# EAGLE board PCB-BI8-2x8_dev (EAGLE 6.4)

Size 139.7 x 35.56 mm. Coordinates in mm from the lower left corner, seen from the top.
Outline: 0,0 139.7,0 139.7,35.56 0,35.56 0,0
Copper layers (1*16): Top 0.035mm / dielectric 1.5mm / Bottom 0.035mm
Design rules "Fusion_eagle_rule_v1.1": minimum track width 6mil, minimum drill 12mil, track to track 6mil, track to pad 6mil, pad to pad 6mil, via to via 6mil, smd to smd 0mil, copper to edge 10mil, drill to drill 10mil, minimum pad ring 10mil, minimum via ring 6mil, stop-mask expansion 2mil, vias tented up to drill 100mil, thermal gap 10mil
Net classes: 0 default: width 0.203 mm, drill 0.406 mm, clearance 0.203 mm; 1 Power: width 0.406 mm, drill 0.61 mm, clearance 0.203 mm

## Footprints (pad centres in the part's own frame; a part is rotated, then mirrored left to right if it is on the bottom)
LP11 = drill 1.2: COM 0,0; P$2 0,2.54; P$3 0,-2.54; P$4 4.5,3.81; P$5 4.5,-3.81 | hole 1.3: -6.35,6.35; 6.35,6.35; 6.35,-6.35; -6.35,-6.35
0603-CAP = smd 1.1 x 1: 1 -0.85,0; 2 0.85,0
0805 = smd 0.8 x 1.2: 1 -0.9,0; 2 0.9,0
SSOP28 = smd 0.4 x 1.5: 1 -4.225,-3.625; 2 -3.575,-3.625; 3 -2.925,-3.625; 4 -2.275,-3.625; 5 -1.625,-3.625; 6 -0.975,-3.625; 7 -0.325,-3.625; 8 0.325,-3.625; 9 0.975,-3.625; 10 1.625,-3.625; 11 2.275,-3.625; 12 2.925,-3.625; 13 3.575,-3.625; 14 4.225,-3.625; 15 4.225,3.625; 16 3.575,3.625; 17 2.925,3.625; 18 2.275,3.625; 19 1.625,3.625; 20 0.975,3.625; 21 0.325,3.625; 22 -0.325,3.625; 23 -0.975,3.625; 24 -1.625,3.625; 25 -2.275,3.625; 26 -2.925,3.625; 27 -3.575,3.625; 28 -4.225,3.625
TSSOP28 = smd 0.305 x 0.991: 1 -4.225,-2.918; 2 -3.575,-2.918; 3 -2.925,-2.918; 4 -2.275,-2.918; 5 -1.625,-2.918; 6 -0.975,-2.918; 7 -0.325,-2.918; 8 0.325,-2.918; 9 0.975,-2.918; 10 1.625,-2.918; 11 2.275,-2.918; 12 2.925,-2.918; 13 3.575,-2.918; 14 4.225,-2.918; 15 4.225,2.918; 16 3.575,2.918; 17 2.925,2.918; 18 2.275,2.918; 19 1.625,2.918; 20 0.975,2.918; 21 0.325,2.918; 22 -0.325,2.918; 23 -0.975,2.918; 24 -1.625,2.918; 25 -2.275,2.918; 26 -2.925,2.918; 27 -3.575,2.918; 28 -4.225,2.918
0603-RES = smd 1.1 x 1: 1 -0.85,0; 2 0.85,0
2X4 = drill 1.016 pad 1.88 octagon: 1 -3.81,-1.27; 2 -3.81,1.27; 3 -1.27,-1.27; 4 -1.27,1.27; 5 1.27,-1.27; 6 1.27,1.27; 7 3.81,-1.27; 8 3.81,1.27
3.2MMPAD6MM = drill 3.2 pad 6: P$1 0,0
3BITADDR = drill 0.6: A0 -2.2,0; A1 0,0; A2 2.2,0; H1 -2.2,2; H2 0,2; H3 2.2,2; L1 -2.2,-2; L2 0,-2; L3 2.2,-2

## Placement (x,y rotation side)
B1  LP11-B"  [LP11]  16.51,10.16 0 top
B1ALT  LP11-B"  [LP11]  16.51,17.78 180 top
B2  LP11-B"  [LP11]  31.75,10.16 180 top
B3  LP11-B"  [LP11]  46.99,10.16 0 top
B4  LP11-B"  [LP11]  62.23,10.16 0 top
B4ALT  LP11-B"  [LP11]  54.61,10.16 0 top
B5  LP11-B"  [LP11]  16.51,25.4 0 top
B6  LP11-B"  [LP11]  31.75,25.4 180 top
B7  LP11-B"  [LP11]  46.99,25.4 0 top
B8  LP11-B"  [LP11]  62.23,25.4 0 top
B8ALT  LP11-B"  [LP11]  54.61,25.4 0 top
B9  LP11-B"  [LP11]  77.47,10.16 0 top
B9ALT  LP11-B"  [LP11]  69.85,10.16 0 top
B10  LP11-B"  [LP11]  92.71,10.16 180 top
B11  LP11-B"  [LP11]  107.95,10.16 0 top
B12  LP11-B"  [LP11]  123.19,10.16 0 top
B13  LP11-B"  [LP11]  77.47,25.4 0 top
B13ALT  LP11-B"  [LP11]  69.85,25.4 0 top
B14  LP11-B"  [LP11]  92.71,25.4 180 top
B15  LP11-B"  [LP11]  107.95,25.4 0 top
B16  LP11-B"  [LP11]  123.19,25.4 0 top
B16ALT  LP11-B"  [LP11]  123.19,17.78 180 top
C1  100nF  [0603-CAP]  40.51,29.97 0 bottom
C2  100nF  [0603-CAP]  44.96,11.96 90 bottom
C3  10uF  [0805]  134.62,11.15 0 bottom
C5  100nF  [0603-CAP]  105.66,11.96 90 bottom
IC1  MCP23017SS  [SSOP28]  39.37,24.38 180 bottom
IC2  PCA9685  [TSSOP28]  39.37,10.16 180 bottom
IC3  PCA9685  [TSSOP28]  100.33,10.16 180 bottom
R1  270  [0603-RES]  125.86,23.37 180 bottom
R2  270  [0603-RES]  125.86,27.43 180 bottom
R3  270  [0603-RES]  110.62,23.37 180 bottom
R4  270  [0603-RES]  110.62,27.43 180 bottom
R5  270  [0603-RES]  64.9,23.37 180 bottom
R6  270  [0603-RES]  64.9,27.43 180 bottom
R7  270  [0603-RES]  49.66,23.37 180 bottom
R8  270  [0603-RES]  49.66,27.43 180 bottom
R9  270  [0603-RES]  29.08,27.43 0 bottom
R10  270  [0603-RES]  29.08,23.37 0 bottom
R11  270  [0603-RES]  19.18,23.37 180 bottom
R12  270  [0603-RES]  19.18,27.43 180 bottom
R13  270  [0603-RES]  64.9,8.13 180 bottom
R14  270  [0603-RES]  64.9,12.19 180 bottom
R15  270  [0603-RES]  49.66,8.13 180 bottom
R16  270  [0603-RES]  49.66,12.19 180 bottom
R17  270  [0603-RES]  29.08,12.19 0 bottom
R18  270  [0603-RES]  29.08,8.13 0 bottom
R19  270  [0603-RES]  19.18,8.13 180 bottom
R20  270  [0603-RES]  19.18,12.19 180 bottom
R21  270  [0603-RES]  90.04,27.43 0 bottom
R22  270  [0603-RES]  90.04,23.37 0 bottom
R23  270  [0603-RES]  80.14,23.37 180 bottom
R24  270  [0603-RES]  80.14,27.43 180 bottom
R25  270  [0603-RES]  125.86,8.13 180 bottom
R26  270  [0603-RES]  125.86,12.19 180 bottom
R27  270  [0603-RES]  110.62,8.13 180 bottom
R28  270  [0603-RES]  110.62,12.19 180 bottom
R29  270  [0603-RES]  90.04,12.19 0 bottom
R30  270  [0603-RES]  90.04,8.13 0 bottom
R31  270  [0603-RES]  80.14,8.13 180 bottom
R32  270  [0603-RES]  80.14,12.19 180 bottom
SERIAL  M04X2  [2X4]  134.62,17.78 90 bottom
U$15  GNDPAD6MM  [3.2MMPAD6MM]  3.5,3.5 0 top
U$18  GNDPAD6MM  [3.2MMPAD6MM]  136.2,3.5 0 top
U$19  3BITADDR  [3BITADDR]  4.19,17.4 0 bottom
U$20  GNDPAD6MM  [3.2MMPAD6MM]  3.5,32.06 0 top
U$21  GNDPAD6MM  [3.2MMPAD6MM]  136.2,32.06 0 top

## Library data of the parts
B1 B1ALT B2-B4 B4ALT B5-B8 B8ALT B9 B9ALT B10-B13 B13ALT B14-B16 B16ALT U$15 U$18-U$21 = SKAARHOJ
C1-C3 C5 R1-R32 SERIAL = SparkFun
IC1 = microchip; MF: MICROCHIP; MPN: MCP23017-E/SS; OC_FARNELL: 1467674; OC_NEWARK: 31K2960
IC2 IC3 = wsmith

## Nets
5V [Power]: B1.COM B1ALT.COM B2.COM B3.COM B4.COM B4ALT.COM B5.COM B6.COM B7.COM B8.COM B8ALT.COM B9.COM B9ALT.COM B10.COM B11.COM B12.COM B13.COM B13ALT.COM B14.COM B15.COM B16.COM B16ALT.COM C1.2 C2.1 C3.1 C5.1 IC1.9 IC1.18 IC2.4 IC2.5 IC2.24 IC2.28 IC3.24 IC3.28 SERIAL.2 U$19.H1 U$19.H2 U$19.H3
A0: IC1.15 IC2.1 IC3.1 U$19.A0
A1: IC1.16 IC2.2 IC3.2 U$19.A1
A2: IC1.17 IC2.3 IC3.3 U$19.A2
DISP_DATA_OUT: SERIAL.6
GND [Power]: B1.P$4 B1ALT.P$4 B2.P$4 B3.P$4 B4.P$4 B4ALT.P$4 B5.P$4 B6.P$4 B7.P$4 B8.P$4 B8ALT.P$4 B9.P$4 B9ALT.P$4 B10.P$4 B11.P$4 B12.P$4 B13.P$4 B13ALT.P$4 B14.P$4 B15.P$4 B16.P$4 B16ALT.P$4 C1.1 C2.2 C3.2 C5.2 IC1.10 IC2.14 IC2.23 IC2.25 IC3.4 IC3.5 IC3.14 IC3.23 IC3.25 SERIAL.1 U$15.P$1 U$18.P$1 U$19.L1 U$19.L2 U$19.L3 U$20.P$1 U$21.P$1
GPA0: B8.P$5 B8ALT.P$5 IC1.21
GPA1: B7.P$5 IC1.22
GPA2: B6.P$5 IC1.23
GPA3: B5.P$5 IC1.24
GPA4: B1.P$5 B1ALT.P$5 IC1.25
GPA5: B2.P$5 IC1.26
GPA6: B3.P$5 IC1.27
GPA7: B4.P$5 B4ALT.P$5 IC1.28
GPA8: B16.P$5 B16ALT.P$5 IC1.1
GPA9: B15.P$5 IC1.2
GPA10: B14.P$5 IC1.3
GPA11: B13.P$5 B13ALT.P$5 IC1.4
GPA12: B9.P$5 B9ALT.P$5 IC1.5
GPA13: B10.P$5 IC1.6
GPA14: B11.P$5 IC1.7
GPA15: B12.P$5 IC1.8
I2C_SCL: IC1.12 IC2.26 IC3.26 SERIAL.4
I2C_SDA: IC1.13 IC2.27 IC3.27 SERIAL.3
L0: B1.P$2 B1ALT.P$2 R20.1
L1: B1.P$3 B1ALT.P$3 R19.1
L2: B2.P$2 R18.1
L3: B2.P$3 R17.1
L4: B3.P$2 R16.1
L5: B3.P$3 R15.1
L6: B4.P$2 B4ALT.P$2 R14.1
L7: B4.P$3 B4ALT.P$3 R13.1
L8: B5.P$2 R12.1
L9: B5.P$3 R11.1
L10: B6.P$2 R10.1
L11: B6.P$3 R9.1
L12: B7.P$2 R8.1
L13: B7.P$3 R7.1
L14: B8.P$2 B8ALT.P$2 R6.1
L15: B8.P$3 B8ALT.P$3 R5.1
L16: B9.P$2 B9ALT.P$2 R32.1
L17: B9.P$3 B9ALT.P$3 R31.1
L18: B10.P$2 R30.1
L19: B10.P$3 R29.1
L20: B11.P$2 R28.1
L21: B11.P$3 R27.1
L22: B12.P$2 R26.1
L23: B12.P$3 R25.1
L24: B13.P$2 B13ALT.P$2 R24.1
L25: B13.P$3 B13ALT.P$3 R23.1
L26: B14.P$2 R22.1
L27: B14.P$3 R21.1
L28: B15.P$2 R4.1
L29: B15.P$3 R3.1
L30: B16.P$2 B16ALT.P$2 R2.1
L31: B16.P$3 B16ALT.P$3 R1.1
N$1: IC3.13 R25.2
N$2: IC3.12 R26.2
N$3: IC3.11 R27.2
N$4: IC2.13 R13.2
N$5: IC2.12 R14.2
N$6: IC3.10 R28.2
N$7: IC2.11 R15.2
N$8: IC3.9 R29.2
N$9: IC2.10 R16.2
N$10: IC2.9 R17.2
N$11: IC2.8 R18.2
N$12: IC2.7 R19.2
N$13: IC3.8 R30.2
N$14: IC3.7 R31.2
N$15: IC3.6 R32.2
N$16: IC3.15 R24.2
N$17: IC3.16 R23.2
N$18: IC3.17 R22.2
N$19: IC2.6 R20.2
N$20: IC2.15 R12.2
N$21: IC2.16 R11.2
N$22: IC2.17 R10.2
N$23: IC2.18 R9.2
N$24: IC2.19 R8.2
N$25: IC2.20 R7.2
N$26: IC2.21 R6.2
N$27: IC2.22 R5.2
N$28: IC3.18 R21.2
N$29: IC3.19 R4.2
N$30: IC3.20 R3.2
N$31: IC3.21 R2.2
N$32: IC3.22 R1.2
SDI_MOSI: SERIAL.8
SDI_SCLK: SERIAL.7
SLIDER_IN: SERIAL.5

## Tracks (layer width: path | path; a pad name or v marks a point on that pad's centre or on a via)
5V  (37 unrouted)
A0  (3 unrouted)
A1  (3 unrouted)
A2  (3 unrouted)
GND  (42 unrouted)
GPA0  (2 unrouted)
GPA1  (1 unrouted)
GPA2  (1 unrouted)
GPA3  (1 unrouted)
GPA4  (2 unrouted)
GPA5  (1 unrouted)
GPA6  (1 unrouted)
GPA7  (2 unrouted)
GPA8  (2 unrouted)
GPA9  (1 unrouted)
GPA10  (1 unrouted)
GPA11  (2 unrouted)
GPA12  (2 unrouted)
GPA13  (1 unrouted)
GPA14  (1 unrouted)
GPA15  (1 unrouted)
I2C_SCL  (3 unrouted)
I2C_SDA  (3 unrouted)
L0  (2 unrouted)
L1  (2 unrouted)
L2  (1 unrouted)
L3  (1 unrouted)
L4  (1 unrouted)
L5  (1 unrouted)
L6  (2 unrouted)
L7  (2 unrouted)
L8  (1 unrouted)
L9  (1 unrouted)
L10  (1 unrouted)
L11  (1 unrouted)
L12  (1 unrouted)
L13  (1 unrouted)
L14  (2 unrouted)
L15  (2 unrouted)
L16  (2 unrouted)
L17  (2 unrouted)
L18  (1 unrouted)
L19  (1 unrouted)
L20  (1 unrouted)
L21  (1 unrouted)
L22  (1 unrouted)
L23  (1 unrouted)
L24  (2 unrouted)
L25  (2 unrouted)
L26  (1 unrouted)
L27  (1 unrouted)
L28  (1 unrouted)
L29  (1 unrouted)
L30  (2 unrouted)
L31  (2 unrouted)
N$1  (1 unrouted)
N$2  (1 unrouted)
N$3  (1 unrouted)
N$4  (1 unrouted)
N$5  (1 unrouted)
N$6  (1 unrouted)
N$7  (1 unrouted)
N$8  (1 unrouted)
N$9  (1 unrouted)
N$10  (1 unrouted)
N$11  (1 unrouted)
N$12  (1 unrouted)
N$13  (1 unrouted)
N$14  (1 unrouted)
N$15  (1 unrouted)
N$16  (1 unrouted)
N$17  (1 unrouted)
N$18  (1 unrouted)
N$19  (1 unrouted)
N$20  (1 unrouted)
N$21  (1 unrouted)
N$22  (1 unrouted)
N$23  (1 unrouted)
N$24  (1 unrouted)
N$25  (1 unrouted)
N$26  (1 unrouted)
N$27  (1 unrouted)
N$28  (1 unrouted)
N$29  (1 unrouted)
N$30  (1 unrouted)
N$31  (1 unrouted)
N$32  (1 unrouted)

## Text on the board
_bsilk: v07-13 | PCB-BI8-2x8 | SKAARHOJ 2013 | GITHUB: SKAARHOJ-Open-Engineering